# Altium PCB ESC_V1.PcbDoc
Units mm, origin at the board's own origin, x right, y up, seen from the top; angles counter-clockwise.
Board outline 67.06 x 26.04 mm, 4 copper layers (Top Layer, Layer 1, Layer 2, Bottom Layer), stack 0.603 mm thick; 49 components, 34 nets, 167 pads, 98 vias.
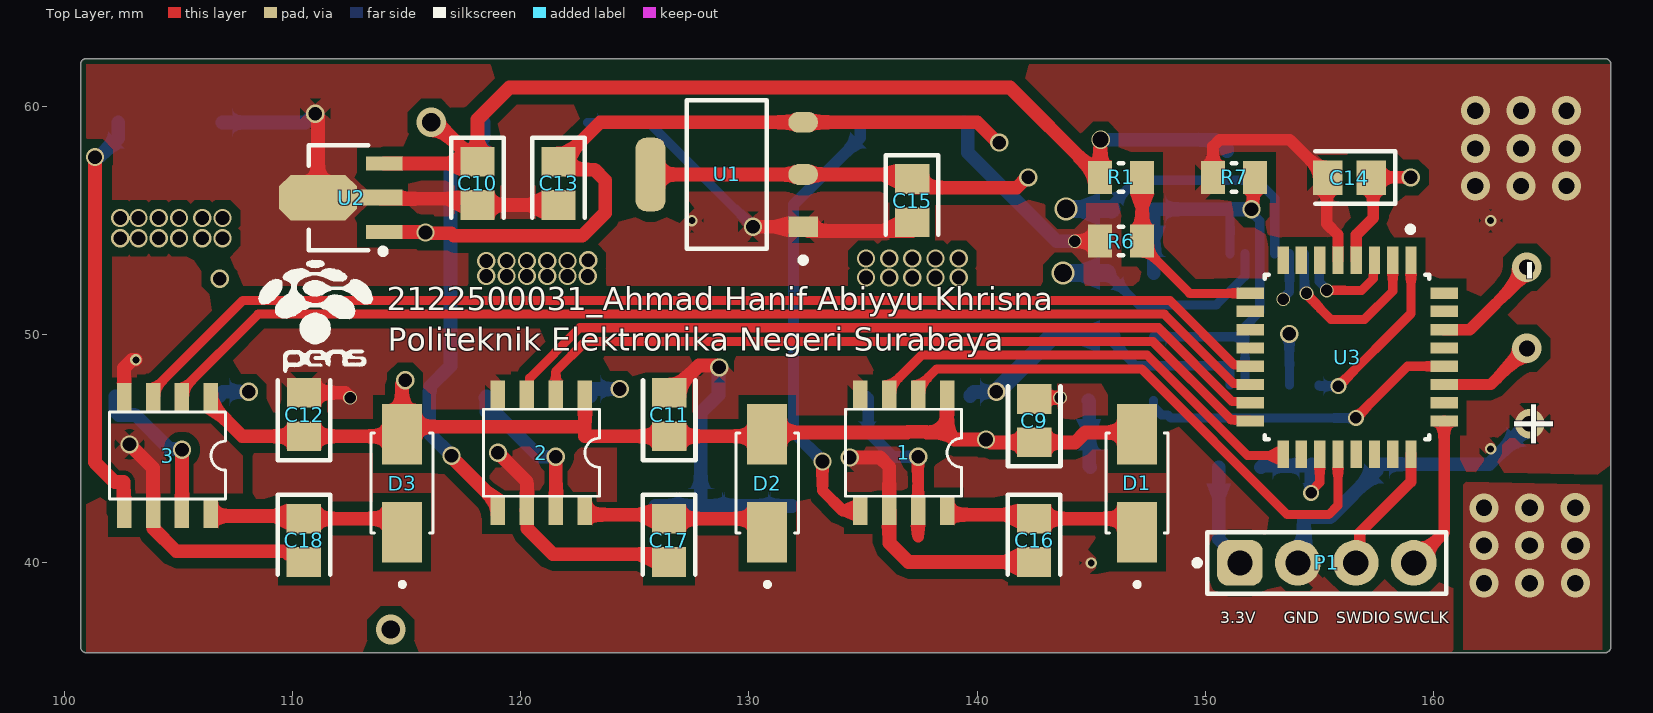
[diagram p0: Top Layer view]
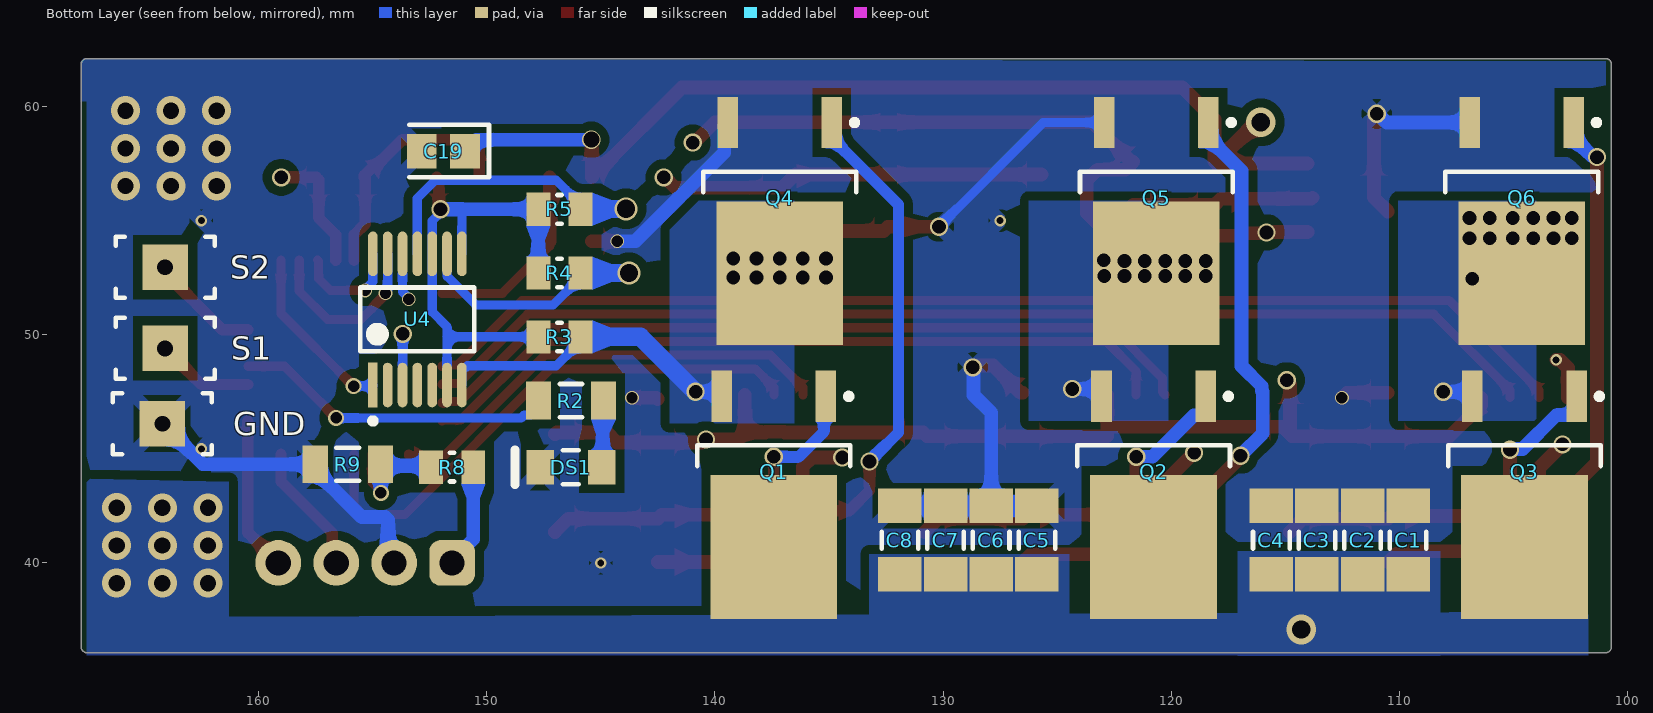
[diagram p1: Bottom Layer view, seen from below]
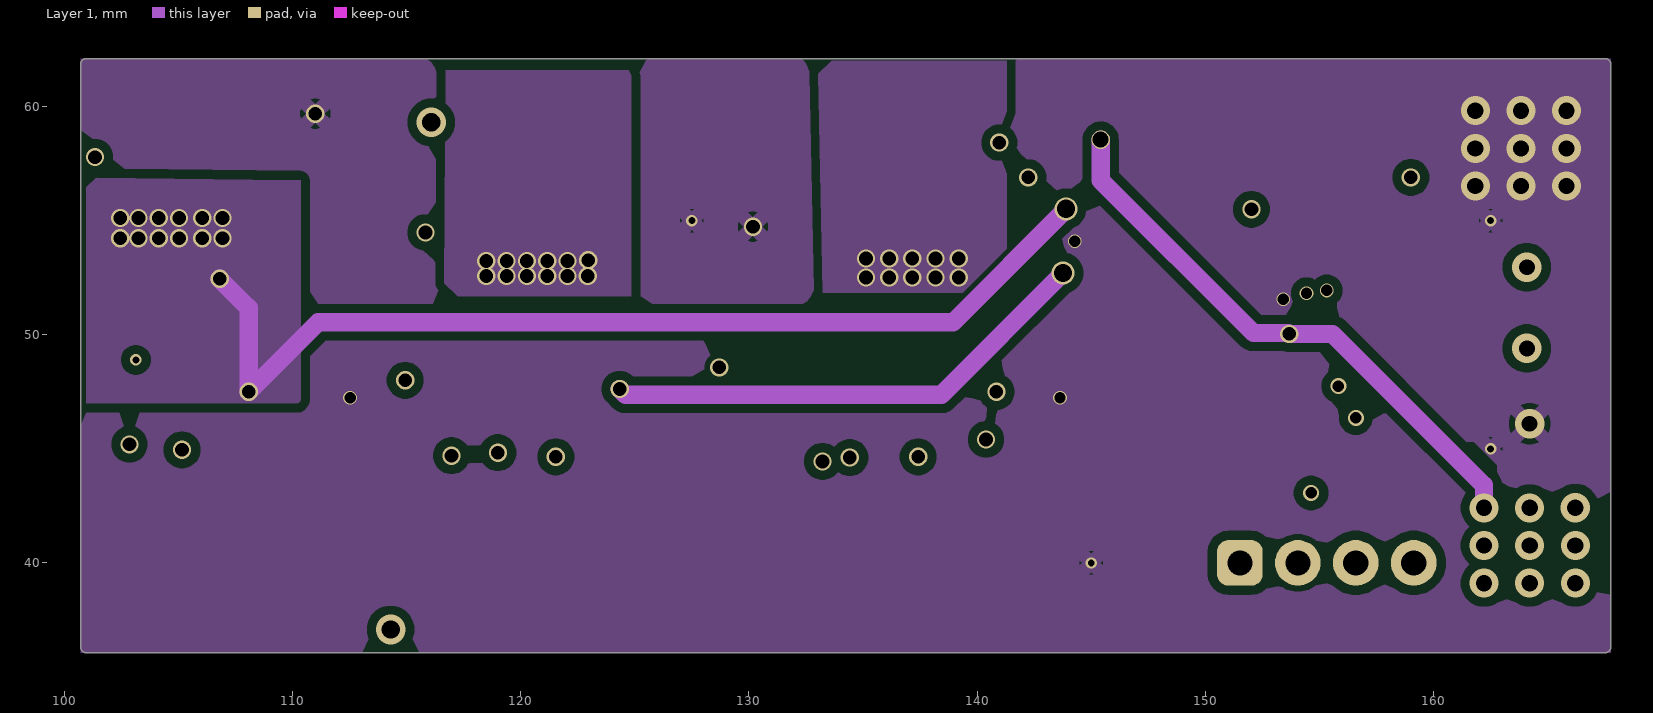
[diagram p2: Layer 1]
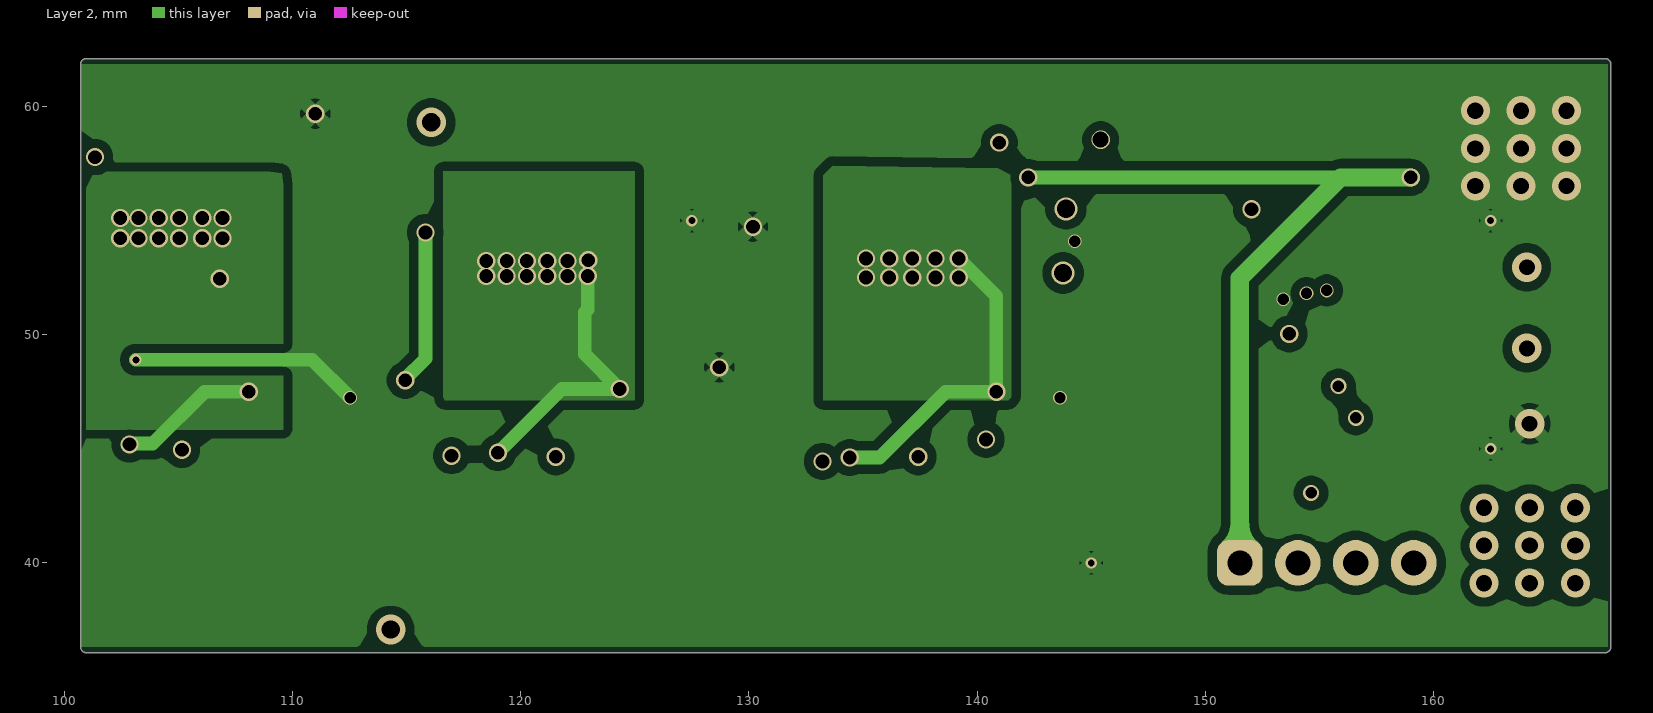
[diagram p3: Layer 2]

## Layer stack, top to bottom
Top Solder: solder mask 0.0102, Solder Resist, Dk 3.5
Top Layer: signal copper 0.0356
Dielectric 2: prepreg 0.0711, PP-006, Dk 4.1
Layer 1: signal copper 0.035
Dielectric 1: dielectric 0.32, FR-4, Dk 4.8
Layer 2: signal copper 0.035
Dielectric 3: prepreg 0.0711, PP-006, Dk 4.1
Bottom Layer: signal copper 0.0356
Bottom Solder: solder mask 0.0102, Solder Resist, Dk 3.5

## Board outline
100.711,36.322 100.711,61.849 cw(c100.965,61.849) 100.965,62.103 167.513,62.103 cw(c167.513,61.849) 167.767,61.849 167.767,36.322 cw(c167.513,36.322) 167.513,36.068 100.965,36.068 cw(c100.965,36.322)

## Design rules (kind name [scope] priority, off if disabled: settings)
Clearance "Clearance GND" [InNet('GND')] p1: gap=0.4 ignorepadtopadclearanceinfootprint=TRUE
Clearance "Clearance Polygon" [All vs IsVia] p2: gap=0.4 ignorepadtopadclearanceinfootprint=TRUE
Clearance [All] p3: gap=0.2 ignorepadtopadclearanceinfootprint=TRUE
PlaneConnect [All] p1: planeconnectstyle=Relief reliefexpansion=0.508 reliefentries=4 reliefconductorwidth=0.6 reliefairgap=0.254
PolygonConnect [All] p1: connectstyle=Relief reliefconductorwidth=0.6 reliefentries=4 polygonreliefangle="45 Angle" airgapwidth=0.254
RoutingVias [All] p1: holewidth=0.5 width=1.27 viastyle="Through Hole" minholewidth=0.2 minwidth=0.2 maxholewidth=5 maxwidth=5
SolderMaskExpansion SolderMaskExpansion_Via [IsVia] p1: expansion=0.102 istentingtop=TRUE useseparateexpansions=TRUE expansionbottom=0.102 istentingbottom=TRUE
SolderMaskExpansion [All] p2: expansion=0.102 istentingtop=FALSE
SupplyNets "Schematic Supply Nets_3" [InNet('GND')] p1: voltage=0.000
SupplyNets "Schematic Supply Nets_2" [InNet('10V')] p2: voltage=0.000
SupplyNets "Schematic Supply Nets_1" [InNet('24V')] p3: voltage=0.000
SupplyNets "Schematic Supply Nets" [InNet('3.3V')] p4: voltage=0.000
Width [All] p1: maxlimit=5 minlimit=0.2 preferedwidth=0.3
29 further rules are at their usual default settings.

## Components (designator, comment, footprint, x,y, rotation, side; value= is the part's Value field where it differs from the comment)
1 "IR2104S" IR2104S 134.874,47.371 r270 top
2 "IR2104S" IR2104S 118.999,47.371 r270 top
3 "IR2104S" IR2104S 102.616,47.244 r270 top
C1 "10uF" FP-C1206C-EB-IPC_A 109.617,41 r90 bottom value="0.10 μF"
C2 "10uF" FP-C1206C-EB-IPC_A 111.617,41 r90 bottom value="0.10 μF"
C3 "10uF" FP-C1206C-EB-IPC_A 113.617,41 r90 bottom value="0.10 μF"
C4 "10uF" FP-C1206C-EB-IPC_A 115.617,41 r90 bottom value="0.10 μF"
C5 "10uF" FP-C1206C-EB-IPC_A 125.889,41 r90 bottom value="0.10 μF"
C6 "10uF" FP-C1206C-EB-IPC_A 127.889,41 r90 bottom value="0.10 μF"
C7 "10uF" FP-C1206C-EB-IPC_A 129.889,41 r90 bottom value="0.10 μF"
C8 "10uF" FP-C1206C-EB-IPC_A 131.889,41 r90 bottom value="0.10 μF"
C9 "2.2uF" C2012-0805 142.494,46.228 r90 top
C10 "0.1uF" C2012-0805 118.11,56.642 r270 top
C11 "2.2uF" C2012-0805 126.5,46.5 r90 top
C12 "2.2uF" C2012-0805 110.5,46.5 r90 top
C13 "0.1uF" C2012-0805 121.666,56.642 r270 top
C14 "100nF" C2012-0805 156.317,56.877 r180 top
C15 "2.2uF" C2012-0805 137.16,55.88 r270 top
C16 "1uF" C2012-0805 142.5,41 r270 top
C17 "1uF" C2012-0805 126.5,41 r270 top
C18 "1uF" C2012-0805 110.5,41 r270 top
C19 "0.1uF" C2012-0805 151.892,58.039 r0 bottom
D1 "ES1J" DIO_ES1J 147,43.5 r90 top
D2 "ES1J" DIO_ES1J 130.8,43.5 r90 top
D3 "ES1J" DIO_ES1J 114.8,43.5 r90 top
DS1 "LED-1206" LUMX-SML-LX1206YC-TR_V 146.304,44.196 r0 bottom
GND "5015" FP-5015-MFG 164.211,46.101 r0 bottom
P1 "61300411121" 61300411121 155.321,40.005 r0 top
Q1 "NCE6080K" INF-PG-TO252-3-313_L 137.414,43 r270 bottom
Q2 "NCE6080K" INF-PG-TO252-3-313_L 120.777,43 r270 bottom
Q3 "NCE6080K" INF-PG-TO252-3-313_L 104.521,43 r270 bottom
Q4 "NCE6080K" INF-PG-TO252-3-313_L 137.16,55 r270 bottom
Q5 "NCE6080K" INF-PG-TO252-3-313_L 120.65,55 r270 bottom
Q6 "NCE6080K" INF-PG-TO252-3-313_L 104.648,55 r270 bottom
R1 "100K" RESC2013X50X30NL20T20 146.304,56.896 r180 top
R2 "100" RESC3216X70X50NL05T20 146.304,47.117 r0 bottom
R3 "10K" RESC2013X50X30NL20T20 146.812,49.911 r180 bottom
R4 "10K" RESC2013X50X30NL20T20 146.812,52.705 r180 bottom
R5 "10K" RESC2013X50X30NL20T20 146.812,55.499 r180 bottom
R6 "10K" RESC2013X50X30NL20T20 146.304,54.102 r0 top
R7 "10K" RESC2013X50X30NL20T20 151.257,56.896 r0 top
R8 "10K" RESC2013X50X30NL20T20 151.511,44.196 r180 bottom
R9 "1206" RESC3216X70X50NL05T20 156.083,44.323 r180 bottom
S1 "5015" FP-5015-MFG 164.084,49.403 r180 bottom
S2 "5015" FP-5015-MFG 164.084,52.959 r180 bottom
U1 "AMS1117" FP-ams1117-IPC_B 129.032,57.023 r180 top
U2 "L78L10" SOT-89_M 112.014,56.007 r180 top
U3 "STM32G070KBT6" FP-LQFP32-5V-MFG 156.21,49.022 r270 top
U4 "LM339PWR" FP-PW0014A-IPC_A 153.035,50.673 r90 bottom

## Footprints (in the part's own frame and the unit in brackets; to place one, negate y for a bottom-side part, rotate by r counter-clockwise, add the part's x,y. Pads: shape width x height; smd on the part's side, far side on the other; paste and mask are expansions set on the pad)
61300411121 [mm] "Pin Header, pitch 2.54 mm, THT, Vertical, single row, 4p"
  rrect50% 2x2 hole 1.1: 1(-3.81,0)
  round 2 hole 1.1: 2(-1.27,0) 3(1.27,0) 4(3.81,0)
  silkscreen extent -5.8,-1.35 5.23,1.35, body extent -5.08,-1.27 5.08,1.27, height 8.57
C2012-0805 [mm] "Capacitor Chip 0805 package"
  rect 1.3x1.5 smd: 1(-0.945,-0.007) 2(0.955,-0.007)
  silkscreen extent -1.99,-1.16 1.51,1.14, body extent -0.89,-0.58 0.89,0.58, height 0.79
DIO_ES1J [mm]
  rect 2.65x1.75 smd: A(2.15,0) K(-2.15,0)
  silkscreen extent -4.54,-1.36 2.19,1.36
FP-5015-MFG [mm]
  rect 2x2 smd paste+0 mask+0: 1(0,0)
  silkscreen extent -2.16,-1.34 2.17,1.34
FP-ams1117-IPC_B [mm]
  rect 1.304x0.912 smd paste+0 mask+0: 1(-3.345,2.29)
  rrect100% 1.304x0.912 smd paste+0 mask+0: 2(-3.345,0) 3(-3.345,-2.29)
  rrect70% 1.304x3.222 smd paste+0 mask+0: 4(3.345,0)
  silkscreen extent -3.47,-3.25 1.75,3.87, body extent -4.25,-3.5 4.25,3.5, height 0.25
FP-C1206C-EB-IPC_A [mm]
  rect 1.505x1.906 smd paste+0 mask+0: 1(-1.501,0) 2(1.501,0)
  silkscreen extent -0.37,-0.8 0.37,0.8, body extent -1.6,-0.8 1.6,0.8, height 0.88
FP-LQFP32-5V-MFG [mm]
  rect 1.2x0.5 smd paste+0 mask+0: 1(-4.25,2.8) 2(-4.25,2) 3(-4.25,1.2) 4(-4.25,0.4) 5(-4.25,-0.4) 6(-4.25,-1.2) 7(-4.25,-2) 8(-4.25,-2.8) 17(4.25,-2.8) 18(4.25,-2) 19(4.25,-1.2) 20(4.25,-0.4) 21(4.25,0.4) 22(4.25,1.2) 23(4.25,2) 24(4.25,2.8)
  rect 0.5x1.2 smd paste+0 mask+0: 9(-2.8,-4.25) 10(-2,-4.25) 11(-1.2,-4.25) 12(-0.4,-4.25) 13(0.4,-4.25) 14(1.2,-4.25) 15(2,-4.25) 16(2.8,-4.25) 25(2.8,4.25) 26(2,4.25) 27(1.2,4.25) 28(0.4,4.25) 29(-0.4,4.25) 30(-1.2,4.25) 31(-2,4.25) 32(-2.8,4.25)
  silkscreen extent -5.72,-3.6 3.6,3.6, body extent -4.95,-4.95 4.95,4.95, height 0.25
FP-PW0014A-IPC_A [mm]
  rect 1.955x0.421 smd paste+0 mask+0: 1(-2.875,1.95)
  rrect100% 1.955x0.421 smd paste+0 mask+0: 2(-2.875,1.3) 3(-2.875,0.65) 4(-2.875,0) 5(-2.875,-0.65) 6(-2.875,-1.3) 7(-2.875,-1.95) 8(2.875,-1.95) 9(2.875,-1.3) 10(2.875,-0.65) 11(2.875,0) 12(2.875,0.65) 13(2.875,1.3) 14(2.875,1.95)
  silkscreen extent -4.57,-2.5 1.4,2.5, body extent -3.17,-2.5 3.23,2.5, height 1.2
INF-PG-TO252-3-313_L [mm] "DPAK, 3-Leads, Body 6.5x6.12mm, Pitch 2.28mm, IPC High Density"
  rect 2.25x0.9 smd: 1(-4.3,2.28) 3(-4.3,-2.28)
  rect 6.3x5.55 smd: 2(2.3,0)
  silkscreen extent -4.42,-3.35 -1.25,3.4, body extent -2.15,-3.32 4.07,3.32, height 2.35
IR2104S [mm]
  rect 1.27x0.635 smd: 1(0,3.81) 2(0,2.54) 3(0,1.27) 4(0,0) 5(5.08,0) 6(5.08,1.27) 7(5.08,2.54) 8(5.08,3.81)
  silkscreen extent 0.63,-0.63 4.44,4.45
LUMX-SML-LX1206YC-TR_V [mm] "SMD, 2-Leads, Body 3.2x1.5mm"
  rect 1.2x1.5 smd: 1(-1.35,0) 2(1.35,0)
  silkscreen extent -0.35,-0.75 2.45,0.75, body extent -1.6,-0.75 1.6,0.75, height 1.25
RESC2013X50X30NL20T20 [mm] "Chip Resistor, 2-Leads, Body 2.00x1.25mm, IPC Medium Density"
  rect 1.05x1.45 smd: 1(-0.925,0) 2(0.925,0)
  silkscreen extent -0.1,-0.63 0.1,0.63, body extent -1.1,-0.72 1.1,0.72, height 0.5
RESC3216X70X50NL05T20 [mm] "Chip Resistor, 2-Leads, Body 3.20x1.60mm, IPC Medium Density"
  rect 1.1x1.65 smd: 1(-1.425,0) 2(1.425,0)
  silkscreen extent -0.5,-0.72 0.5,0.72, body extent -1.63,-0.82 1.62,0.82, height 0.7
SOT-89_M [mm] "SOT89, 3-Leads, Body 4.5x2.4 mm, Pitch 1.5mm, Lead Span 4.1mm, IPC Low Density"
  rect 1.6x0.6 smd: 1(-2,1.5) 3(-2,-1.5)
  rect 2x0.7 smd: 2(-1.8,0)
  oct 3.4x2 smd: 2(0.9,0)
  silkscreen extent -2.08,-2.3 1.3,2.47, body extent -1.3,-2.3 1.3,2.3, height 1.6

## Part data
1 2 3: "Half-Bridge Gate Driver IC Non-Inverting 8-SOIC", Package="SO-8 Infineon", Availability=Unavailable, MF="Infineon Technologies", MP=IR2104S, Price=None, SnapEDA_Link=https://www.snapeda.com/parts/IR2104S/Infineon%20Technologies/view-part/582439/?ref=snap
C1 C2 C3 C4 C5 C6 C7 C8: library part CMP-03020-000153-1, "CAP CER 0.1UF 100V X7R 1206", Capacitance="0.10 μF", Manufacturer=KEMET, Manufacturer Part Number=C1206C104K1RACTU, Package=C1206C-EB, Temperature="-55°C to +150°C", Temperature Characteristic=X7R, Temperature Coefficient=15%, Temperature Range High=+150°C, Temperature Range Low=-55°C, Tolerance=0.1, Voltage Rating="100 V", Automotive=Yes, Automotive Grade="Grade 0", Category=Cap, ComponentLink2Description=Datasheet, ComponentLink2URL=https://content.kemet.com/datasheets/KEM_C1007_X8R_ULTRA_150C_SMD.pdf, Device Class L1="Passive Components", Device Class L2=Capacitors, Device Class L3="Ceramic Capacitors", Digikey Description="CAP CER 0.1UF 100V X7R 1206", Height=0.88mm, Ipc Land Pattern Name=CAPC320160X78, Lead Free=Yes, Material=Ceramic, Mouser Description="CAP CER 0.1UF 100V X7R 1206", Octopart=https://octopart.com/c1206c104k1ractu-kemet-89521, RoHS=TRUE
C9 C10 C11 C12 C13 C14 C15 C16 C17 C18 C19: library part Capacitor, "Capacitor", Volt=16V, AEMS Code=2100341, ComponentLink1Description="Digikey Part Link", ComponentLink2Description="Open Datasheet", ComponentLink2URL=H:\LIBRARY\LIBRARY.Datasheet\, Published=13-April-2009, Publisher="Hoang Nguyen", Vendor=Digikey
D1 D2 D3: "Diode Standard 600V 1A Surface Mount SMA (DO-214AC)", Package="SMA-2 ON Semiconductor", Arrow_Electronics-Purchase-URL=https://snapeda.com/shop?store=Arrow+Electronics&id=1637442, Availability=Good, DigiKey-Purchase-URL=https://snapeda.com/shop?store=DigiKey&id=1637442, ES1J=https://www.snapeda.com/parts/ES1J/ON%20Semiconductor/view-part/1637442/?ref=eda, MF="ON Semiconductor", Mouser-Purchase-URL=https://snapeda.com/shop?store=Mouser&id=1637442, MP=ES1J, Price=None, SnapEDA_Link=https://www.snapeda.com/parts/ES1J/ON%20Semiconductor/view-part/1637442/?ref=snap
DS1: library part CMP-2000-07124-1, "Yellow LED, Water Clear Len, 585 nm, 2.1 V, -40 to 85 degC, 2-Pin SMD, RoHS, Tape and Reel", Color=Yellow, Current - Test=20mA, Lens Color=Colorless, Manufacturer=Lumex, Millicandela Rating=6mcd, Package / Case=1206(3216Metric), Package Description="2-Pin Surface Mount Device, Body 3.2 x 1.5 mm", Package Reference=SML-LX1206YC-TR, Standard Package=3,000, Supplier Device Package=1206, Voltage - Forward (Vf) (Typ)=2.1V, Catalog Drawings=SML-LX1206SeriesTopSML-LX1206SeriesSideSML-LX1206SeriesBottomSML-LX1206SeriesFootprint, Category=Optoelectronics, Datasheet URL=http://www.lumex.com/content/files/ProductAttachment/SML-LX1206YC-TR.pdf, Datasheet Version="Rev. K, 08/2012", Family=LEDIndication-Discrete, Features=-, Height (Max)=1.10mm, Lens Style/Size=RectanglewithFlatTop, Lens Transparency=Clear, Manufacturer URL=http://www.lumexinstruments.com/, Mounting Technology=SurfaceMount, Mounting Type=SurfaceMount, Online Catalog=SML-LX1206RectanglewithFlatTop1206PackageLEDs, Other Names=67-1358-2LU60357TRSMLLX1206YCTR, Packaging=Tape&Reel(TR), Product Training Modules=LEDsBenefitsofCustomLEDandLCDTechnology, RoHS Information=RoHSCertofCompliance, Series=-, Size / Dimension=3.20mmLx1.60mmW, Viewing Angle=160°, Wavelength - Dominant=-, Wavelength - Peak=585nm
GND S1 S2: library part CMP-2000-05183-2, "PC TEST POINT MINIATURE", Manufacturer=keystone, Automotive=No, Category=Conn, ComponentLink2Description=Datasheet, ComponentLink2URL=http://www.keyelco.com/product-pdf.cfm?p=1353, Conn Orientation=Straight, Contact Material=Silver, Device Class L1=Connectors, Device Class L2=unset, Device Class L3=unset, Digikey Description="PC TEST POINT MINIATURE", Height=1.65mm, Lead Free=Yes, Manufacturer Part Number=5015, Number of Contacts=1, Octopart=https://octopart.com/5015-keystone-3822, Package=5015, RoHS=TRUE
P1: library part CMP-1502-01064-3, Color=Black, Contact Resistance=20mΩ, Current Rating=3A, Max Operating Temperature=105°C, Min Operating Temperature=-40°C, Operating Supply Voltage=250V, Connector Type="Male Pin", Contact Material=Copper, Contact Mating Length=5.9944mm, Contact Plating=Gold, Gender=Male, Height=8.89mm, Lead Free="Lead Free", Lead Pitch=2.54mm, Mount="Through Hole", NexarPartId=32855522, Number of Contacts=4, Number of Pins=4, Number of Positions=4, Number of Rows=1, Orientation=Vertical, Packaging=Bulk, Pitch=2.54mm, REACH SVHC=Unknown, RoHS=Compliant, Termination=Solder, Voltage Rating=250V
Q1 Q2 Q3 Q4 Q5 Q6: library part CMP-1164-00349-1, "N-Channel CoolMOS E6 Power-Transistor, 600 V VDS, 7.3 A ID, -55 to 150 degC, PG-TO252-3-313, Reel, Green", Manufacturer=Infineon, PartNumber=IPD60R600C6, ComponentLink1Description="Manufacturer URL", ComponentLink1URL=http://www.infineon.com/, ComponentLink2Description=Datasheet, ComponentLink2URL=http://www.infineon.com/dgdl/IPD60R600C6_2_0.pdf?folderId=db3a30431ff98815012019af55de3f2c&fileId=db3a30432239cccd0122a83152b97d6f, ComponentLink3Description="Package Specification", ComponentLink3URL=http://www.infineon.com/dgdl/PG-TO252-3-313-Package_Overview.pdf?folderId=db3a30432b57a660012b81890ade72d2&fileId=db3a30432b57a660012b8193af2872eb, DatasheetVersion="Rev. 2.0", Green=TRUE, ID (max)="7.3Â A", IDpuls (max)="19Â A", Mounting Technology="Surface Mount", PackageDescription="3-Pin Plastic (Green) Transistor Single Outline Package, 6.5 x 6.12 mm Body, 2.28 mm Pitch", PackageReference=PG-TO252-3-313, PackageVersion=Oct-10, Packing=Reel, Polarity=N, Ptot (max)="63Â W", QG="20.5Â nC", RDS (on) (max)="600Â mOhm", Rth="2Â K/W", RthJA (max)="62Â K/W", RthJC (max)="2Â K/W", Technology="CoolMOS C6", VDS (max)="600Â V", VGS(th) (max)="3.5Â V", VGS(th) (min)="2.5Â V"
R1 R3 R4 R5 R6 R7 R8: library part CMP-2001-04915-1, Manufacturer="Vishay Dale", Part Number=CRCW080510R0FKEA
R2 R9: library part CMP-2003-00541-1, Manufacturer=Panasonic, Part Number=ERJ-8GEY0R00V
U1: library part CMP-209535-000002-1, "1A LOW DROPOUT VOLTAGE REGULATOR", RoHS Compliant=Yes
U2: library part CMP-0244-00399-1, "Positive Voltage Regulator, 10V, 4-Pin SOT-89, Tape and Reel", ComponentLink1Description="Manufacturer URL", ComponentLink1URL=http://www.st.com, ComponentLink2Description=Datasheet, ComponentLink2URL=http://www.st.com/internet/com/TECHNICAL_RESOURCES/TECHNICAL_LITERATURE/DATASHEET/CD00000446.pdf, DatasheetVersion=1/02/2011, PackageDescription="3-Pin SOT-89 Package 1.5 mm Pitch, 4.1 mm Lead Span", PackageReference=SOT-89, PackageVersion=2011
U3: library part CMP-12105-000041-1, "MAINSTREAM VALUE LINE, ARM CORTE", Ambient Temperature Range High=+85°C, Ambient Temperature Range Low=-40°C, Frequency=64MHz, Manufacturer=STMicroelectronics, Max Junction Temp=+105°C, Max Supply Voltage=3.6V, Min Supply Voltage=2V, Nominal Supply Current=0.3-6.9mA, Package=LQFP32-5V, Temperature="-40°C to +85°C", Automotive=No, Category=IC, ComponentLink2Description=Datasheet, ComponentLink2URL=https://www.st.com/resource/en/datasheet/stm32g070kb.pdf, Core Architecture="ARM Cortex-M0+", Data Bus Width=32bits, Device Class L1="Integrated Circuits (ICs)", Device Class L2="Embedded Processors and Controllers", Device Class L3=Microcontrollers, Digikey Description="MAINSTREAM VALUE LINE, ARM CORTE", Height=1.6mm, Interface=I2C,SPI,UART,USART,LIN,IrDA,I2S,SMBus,Other, Ipc Land Pattern Name=QFP80P900X900X160-32, Lead Free=Yes, Manufacturer Part Number=STM32G070KBT6, Memory Size=128KBytes, Memory Type=FLASH, Mouser Description="Cortex M0 128K LQFP32 85°C", Number Of A/D Converters=1, Number Of Adc Channels=13, Number Of Cores=1, Number Of I2C Channels=2, Number Of I/Os=29, Number Of Spi Channels=2, Number Of Timers/Counters=11, Number Of Uart Channels=4, Octopart=https://octopart.com/stm32g070kbt6-stmicroelectronics-97300430, Ram Size=36KBytes, RoHS=TRUE, Standoff Height=0.05mm, Temperature Range High=+85°C, Temperature Range Low=-40°C
U4: library part CMP-04896-000076-1, "IC QUAD DIFF COMPARATOR 14-TSSOP", Case/Package=TSSOP, Dual Supply Voltage=9V, Input Bias Current=250nA, Input Offset Voltage (Vos)=5mV, Max Dual Supply Voltage=15V, Max Operating Temperature=70°C, Max Supply Current=500uA, Max Supply Voltage=30V, Min Dual Supply Voltage=1V, Min Operating Temperature=0°C, Min Supply Voltage=2V, Nominal Supply Current=2mA, Operating Supply Voltage=28V, Output Current=20mA, Output Current per Channel=6mA, Package Quantity=2000, Quiescent Current=2.5mA, Voltage Gain=106.02dB, Contact Plating=Gold, Height=1.15mm, Lead Free="Lead Free", Length=5mm, Max Input Current=250nA, Mount="Surface Mount", Number of Channels=4, Number of Elements=4, Number of Pins=14, Output Type=TTL, Packaging="Tape and Reel", Radiation Hardening=No, REACH SVHC="No SVHC", Response Time=1.3us, RoHS Compliant=Yes, Series=LM339, Supply Current=2mA, Technology=BIPOLAR, Weight=0.002018oz, Width=4.4mm

## Via types
v1: diameter 0.8, hole 0.6, Top Layer to Bottom Layer, tented both sides, 58 vias
v2: diameter 1.27, hole 0.711, Top Layer to Bottom Layer, tented both sides, 16 vias
v3: diameter 0.6, hole 0.5, Top Layer to Bottom Layer, tented both sides, 6 vias
v4: diameter 0.5, hole 0.3, Top Layer to Bottom Layer, tented both sides, 5 vias
v5: diameter 0.7, hole 0.5, Top Layer to Bottom Layer, tented both sides, 3 vias
v6: diameter 1.3, hole 0.7, Top Layer to Bottom Layer, tented both sides, 3 vias
v7: diameter 1, hole 0.8, Top Layer to Bottom Layer, tented both sides, 2 vias
v8: diameter 1.3, hole 0.8, Top Layer to Bottom Layer, tented both sides, 2 vias
v9: diameter 0.8, hole 0.7, Top Layer to Bottom Layer, tented both sides, 1 vias
v10: diameter 1.3, hole 0.711, Top Layer to Bottom Layer, 1 vias
v11: diameter 1.27, hole 0.711, Top Layer to Bottom Layer, 1 vias

## Nets (pads, with @x,y where several pads share a name; then routed paths per layer and width w, separated by ;. In a path a pad name is that pad's centre, name@x,y a point inside that pad or via, vN(x,y) a via of type N, cw(c..) or ccw(c..) an arc to the next point about the centre after c; other vN are vias at no path point)
3.3V: C14.1 C15.1 P1.1 R8.2 U1.2 U1.4 U3.4 | length 62.6
  Top Layer w0.5: U3.4 156.61,54.375 157.353,55.118 157.353,56.793 157.456,56.896 v1(159.004,56.896)
  Top Layer w0.6: U1.4 U1.2 136.474,57.023 137.053,56.444 137.153,56.444 141.733,56.444 142.186,56.896 v1(142.24,56.896)
  Layer 2 w0.6: v1(142.24,56.896) 142.246,56.89 155.916,56.89
  Layer 2 w0.8: P1.1 151.511,46.942 151.511,52.479 155.928,56.896 v1(159.004,56.896)
  Bottom Layer w0.6: R8.2 150.586,41.038 151.511,40.113 P1.1
10V: 1.1 2.1 3.1 C9.1 C11.1 C12.1 C13.1 D1.A D2.A D3.A U1.3 U2.1 | length 88.9
  Top Layer w0.6: 3.1 106.426,46.926 107.797,45.555 C12.1 114.705,45.555 D3.A ; U2.1 115.824,54.507 v1(115.824,54.483) 115.862,54.445 116.955,54.445 117.063,54.337 122.699,54.337 123.698,55.336 123.698,56.769 123.23,57.237 122.009,57.237 C13.1 ; v1(114.935,48.006) 114.935,47.952 114.8,47.817 D3.A ; C13.1@121.759,57.587 123.485,59.313 U1.3 140,59.313 140.793,58.52 140.816,58.52 v1@140.932,58.404 ; 2.1 122.809,45.974 ; D2.A@130.705,45.555 C11.1 122.809,45.555 122.809,45.974 ; D2.A@130.87,45.72 136.928,45.72 136.958,45.75 137.765,45.75 137.795,45.72 138.684,45.72 ; 1.1 138.684,45.72 ; v1(140.387,45.413) 138.991,45.413 138.684,45.72 ; v1@140.452,45.478 140.452,45.401 140.57,45.283 144.295,45.283 144.731,45.72 146.93,45.72 D1.A ; D3.A 115.124,45.974 122.809,45.974
  Layer 2 w0.6: v1(114.935,48.006) 114.935,48.06 115.824,48.949 v1(115.824,54.483)
  other v1: 140.97,58.42
24V: C1.1 C2.1 C3.1 C4.1 C5.1 C6.1 C7.1 C8.1 C10.1 C19.1 Q1.2 Q2.2 Q3.2 R1.2 U2.3 U4.3 | length 73.1
  Top Layer w0.6: U2.3 118.023,57.507 C10.1 ; v8(116.078,59.309) 116.212,59.175 116.415,59.175 118.003,57.587 C10.1 ; v9(145.415,58.547) 145.397,58.529 145.397,56.914 R1.2 145.379,57.096 145.154,57.321 144.954,57.321 141.442,60.833 119.507,60.833 118.103,59.429 C10.1
  Layer 1 w0.8: v9(145.415,58.547) 145.415,56.769 152.108,50.076 153.632,50.076 v1(153.67,50.038) 155.575,50.038 162.211,43.402 v2(162.211,42.418)
  Bottom Layer w0.4: v1(153.67,50.038) 153.681,50.027 153.681,47.802 U4.3
  Bottom Layer w0.6: v9(145.415,58.547) 150.446,58.547 150.497,58.496 150.597,58.496 150.947,58.146 C19.1
  other v2: 162.211,39.116 164.211,39.116 166.211,39.116 162.211,40.767 164.211,40.767 166.211,40.767 164.211,42.418
  other v8: 114.3,37.084
  other v10: 166.211,42.418
A: 1.6 C16.2 Q1.3 Q4.2 R3.2 U4.7 | length 40
  Top Layer w0.6: v1(134.422,44.62) 135.739,44.62 136.144,44.215 1.6 136.162,42.273 136.162,40.876 136.993,40.045 C16.2
  Layer 2 w0.6: v1(134.422,44.62) 135.733,44.62 138.611,47.498 v1(140.843,47.498) 140.843,51.689 v1(139.192,53.34)
  Bottom Layer w0.4: R3.2 145.887,49.711 146.957,48.641 150.84,48.641 150.912,48.569 151.075,48.569 151.085,48.559 U4.7
  Bottom Layer w0.6: Q1.3 139.694,47.348 139.844,47.498 v1(140.843,47.498)
  Bottom Layer w0.8: v1(140.843,47.498) 143.256,49.911 R3.2
  other v1: 135.128,52.505 136.144,52.505 137.16,52.505 138.176,52.505 139.192,52.505 135.128,53.34 136.144,53.34 137.16,53.34 138.176,53.34
A-H: 1.7 Q1.1 | length 7.7
  Top Layer w0.5: 137.414,41.148 1.7 v1(137.414,44.65)
  Bottom Layer w0.5: Q1.1 135.222,47.212 135.222,45.753 136.325,44.65 v1(137.414,44.65)
A-L: 1.5 Q4.1 | length 19.9
  Top Layer w0.5: v1(133.223,44.45) 133.223,43.18 134.112,42.291 1.5
  Bottom Layer w0.5: v1(133.223,44.45) 131.953,45.72 131.953,55.698 134.88,58.625 Q4.1
B: 2.6 C17.2 Q2.3 Q5.2 R4.2 U4.9 | length 56.1
  Top Layer w0.6: v1(118.999,44.831) 120.269,43.561 2.6 ; 2.6@120.251,42.309 120.287,42.273 120.287,41.512 121.412,40.386 126.152,40.386 C17.2
  Layer 1 w0.8: v1(124.333,47.625) 124.587,47.371 138.43,47.371 v7(143.764,52.705)
  Layer 2 w0.6: v1(118.999,44.831) 121.793,47.625 v1(124.333,47.625) 122.809,49.149 122.809,50.978 122.936,51.105 v1(122.936,52.578)
  Bottom Layer w0.4: R4.2@145.687,52.705 147.084,51.308 150.475,51.308 151.731,52.564 151.731,53.544 U4.9
  Bottom Layer w0.6: Q2.3 123.057,47.475 123.207,47.625 v1(124.333,47.625)
  Bottom Layer w0.8: v7(143.764,52.705) R4.2@145.687,52.705
  other v1: 118.491,52.578 119.38,52.578 120.269,52.578 121.158,52.578 122.047,52.578 118.491,53.237 119.38,53.237 120.269,53.237 121.158,53.237 122.047,53.237 122.953,53.266
B-H: 2.7 Q2.1 | length 7
  Top Layer w0.6: v1(121.539,44.65) 2.7 2.7@121.557,42.273
  Bottom Layer w0.6: Q2.1@118.441,47.244 Q2.1 118.497,46.625 118.647,46.475 119.006,46.475 120.831,44.65 v1(121.539,44.65)
B-L: 2.5 Q5.1 | length 19.2
  Top Layer w0.6: v1(116.967,44.704) 117.005,44.666 117.005,44.602 118.999,42.608 2.5
  Bottom Layer w0.6: v1(116.967,44.704) 115.991,45.68 115.991,47.507 116.035,47.55 116.035,47.743 116.924,48.632 116.924,57.179 118.37,58.625 Q5.1
BATT-VOLT: R1.1 R6.2 U3.9 | length 8.6
  Top Layer w0.4: R6.2 147.229,53.902 149.315,51.816 151.892,51.816 151.898,51.822 U3.9
  Top Layer w0.6: R6.2 R1.1
C: 3.6 C18.2 Q3.3 Q6.2 R5.2 U4.11 | length 75.2
  Top Layer w0.6: v1(102.854,45.196) 103.886,44.164 3.6 ; 103.904,41.512 104.902,40.513 109.692,40.513 109.81,40.395 110.143,40.395 C18.2
  Layer 1 w0.8: v1(106.807,52.451) 108.077,51.181 v1(108.077,47.498) 111.125,50.546 138.938,50.546 143.891,55.499 v7(143.891,55.517)
  Layer 2 w0.6: v1(102.854,45.196) 102.892,45.234 103.877,45.234 106.14,47.498 v1(108.077,47.498)
  Bottom Layer w0.4: R5.2@145.887,55.699 146.957,56.769 152.247,56.769 153.039,55.977 153.039,53.552 U4.11
  Bottom Layer w0.6: Q3.3 106.801,47.348 106.951,47.498 v1(108.077,47.498)
  Bottom Layer w0.8: v7(143.891,55.517) 143.9,55.508 145.878,55.508 R5.2
  other v1: 102.446,54.229 103.251,54.229 104.14,54.229 105.029,54.229 106.045,54.229 106.934,54.229 102.446,55.118 103.251,55.118 104.14,55.118 105.029,55.118 106.045,55.118 106.934,55.118
C-H: 3.7 Q3.1 | length 7.1
  Top Layer w0.6: 3.7 v1(105.156,44.958)
  Bottom Layer w0.6: Q3.1 102.241,46.625 102.391,46.475 103.131,46.475 104.61,44.996 105.118,44.996 v1(105.156,44.958)
C-L: 3.5 Q6.1 | length 18.4
  Top Layer w0.6: v1(101.346,57.785) 101.346,44.409 102.205,43.55 102.598,43.55 102.598,42.182 3.5
  Bottom Layer w0.6: v1(101.346,57.785) 101.384,57.823 101.566,57.823 102.368,58.625 Q6.1
FGND: R3.1 R4.1 R5.1 R7.2 U4.6 U4.8 U4.10 | length 22.6
  Top Layer w0.5: v1(152.019,55.499) 152.1,55.58 152.1,56.814 R7.2
  Bottom Layer w0.4: R3.1 151.735,49.911 ; 151.003,55.499 151.085,55.417 U4.8 ; U4.6 151.735,49.911 ; v1(152.019,55.499) 152.019,55.354 152.385,54.988 152.385,51 151.735,50.35 151.735,49.911
  Bottom Layer w0.6: R4.1 R5.1 151.003,55.499 v1(152.019,55.499)
GND: 1.4 2.4 3.4 C1.2 C2.2 C3.2 C4.2 C5.2 C6.2 C7.2 C8.2 C9.2 C10.2 C11.2 C12.2 C13.2 C14.2 C15.2 C19.2 DS1.2 GND.1 P1.2 Q4.3 Q5.3 Q6.3 R6.1 R7.1 R9.1 U1.1 U2.2 U3.5 U4.12 | length 99.2
  Top Layer w0.5: R7.1 150.332,58.254 150.625,58.547 153.699,58.547 154.862,57.384 154.962,57.384 155.362,56.984 C14.2 155.321,56.843 155.321,54.864 155.81,54.375 U3.5
  Top Layer w0.6: 3.4 102.616,48.549 102.967,48.9 v4(103.135,48.9) ; C12.2 112.311,47.455 v3(112.522,47.244) ; U2.2@110.507,55.4 111.114,56.007 111.114,59.52 110.998,59.636 v1(110.998,59.69) ; U2.2@113.814,56.007 113.864,55.957 117.833,55.957 C10.2 C13.2 ; C11.2 126.607,47.455 127.806,48.654 128.565,48.654 128.648,48.571 v1(128.702,48.571) ; v1(130.175,54.737) 130.177,54.735 132.375,54.735 U1.1 132.417,54.733 132.606,54.544 C15.2@137.153,54.544 ; C9.2 142.562,47.244 v3(143.629,47.244) ; v3(144.272,54.102) R6.1
  Layer 2 w0.6: v4(103.135,48.9) 110.866,48.9 v3(112.522,47.244)
  Bottom Layer w0.4: Q5.3 125.612,59.3 v1(130.175,54.737) ; v3(153.416,51.562) 153.416,51.616 153.685,51.885 U4.12
  Bottom Layer w0.6: Q6.3 110.554,59.3 110.944,59.69 v1(110.998,59.69) ; C5.2 C6.2 ; v1(128.702,48.571) 128.664,48.533 128.664,47.364 127.889,46.589 C6.2 ; C8.2 C7.2 C6.2 ; Q4.3 139.59,59.15 139.59,57.99 143.478,54.102 v3(144.272,54.102) ; P1.2 154.319,40.273 154.319,41.889 154.449,42.018 155.478,42.018 157.508,44.048 R9.1 162.433,44.323 v6(164.211,46.101)
  other v2: 161.83,56.515 163.83,56.515 165.83,56.515 161.83,58.166 163.83,58.166 165.83,58.166 161.83,59.817 163.83,59.817
  other v4: 145,40 162.5,45 127.5,55 162.5,55
  other v11: 165.83,59.817
LED: R2.2 U3.28 | length 14.1
  Top Layer w0.4: v5(156.591,46.355) 158.858,48.622 U3.28
  Bottom Layer w0.4: R2.2 147.729,46.842 148.079,46.492 148.354,46.492 148.491,46.355 v5(156.591,46.355)
Net1_8: 1.8 C16.1 D1.K | length 8.8
  Top Layer w0.6: 1.8 138.684,42.135 138.702,42.118 142.32,42.118 C16.1 146.425,41.945 147,41.37 D1.K
Net2_8: 2.8 C17.1 D2.K | length 8.5
  Top Layer w0.6: 2.8 122.809,42.135 122.827,42.118 126.32,42.118 C17.1 130.225,41.945 130.8,41.37 D2.K
Net3_8: 3.8 C18.1 D3.K | length 8.8
  Top Layer w0.6: 3.8 106.426,42.072 106.444,42.054 110.383,42.054 C18.1 114.225,41.945 114.8,41.37 D3.K
NetDS1_1: DS1.1 R2.1 | length 3
  Bottom Layer w0.6: R2.1 144.916,47.079 144.916,44.234 DS1.1
NetR8_1: R8.1 R9.2 U3.19 | length 5.4
  Top Layer w0.4: v5(154.633,43.068) 154.633,43.15 155.01,43.527 U3.19
  Bottom Layer w0.6: R8.1 152.499,44.259 154.595,44.259 R9.2 154.645,44.31 154.645,43.081 v5(154.633,43.068)
OD-A: 1.3 U3.17 | length 20.1
  Top Layer w0.4: 1.3 136.144,47.688 137.561,49.105 147.45,49.105 151.852,44.704 153.416,44.704 153.41,44.71 U3.17
OD-B: 2.3 U3.15 | length 34.7
  Top Layer w0.4: 2.3 120.387,47.489 120.387,48.103 122.589,50.305 147.947,50.305 151.181,47.072 151.81,47.072 151.892,46.99 151.924,47.022 U3.15
OD-C: 3.3 U3.13 | length 51.2
  Top Layer w0.4: 3.3 103.886,47.561 107.83,51.505 148.444,51.505 151.278,48.672 151.861,48.672 151.911,48.622 U3.13
PWM-A: 1.2 U3.20 | length 24.1
  Top Layer w0.4: 1.2 137.414,47.688 138.231,48.505 147.202,48.505 153.589,42.118 155.403,42.118 155.81,42.525 U3.20
PWM-B: 2.2 U3.16 | length 33.4
  Top Layer w0.4: 2.2 121.539,48.407 122.838,49.705 147.699,49.705 151.132,46.272 151.91,46.272 U3.16
PWM-C: 3.2 U3.14 | length 49.8
  Top Layer w0.4: 3.2 105.156,47.561 108.5,50.905 148.196,50.905 151.229,47.872 151.91,47.872 U3.14
S1: S1.1 U3.27 | length 4.3
  Top Layer w0.5: U3.27 162.503,47.822 v6(164.084,49.403)
S2: S2.1 U3.30 | length 4.9
  Top Layer w0.5: U3.30 161.584,50.222 163.937,52.574 163.937,52.812 v6(164.084,52.959)
SWCLK: P1.4 U3.25 | length 6.8
  Top Layer w0.5: P1.4 160.46,41.334 U3.25
SWDIO: P1.3 U3.24 | length 5.8
  Top Layer w0.5: P1.3 156.757,40.171 156.757,41.314 159.01,43.567 U3.24
ZC-A: U3.1 U4.1 | length 7.7
  Top Layer w0.4: v5(155.829,47.752) 159.01,50.933 U3.1
  Bottom Layer w0.4: U4.1 154.985,47.762 154.995,47.752 v5(155.829,47.752)
ZC-B: U3.3 U4.14 | length 4.8
  Top Layer w0.4: v3(155.321,51.943) 156.845,51.943 157.36,52.458 157.36,53.222 U3.3
  Bottom Layer w0.4: U4.14 154.989,53.544 154.989,52.329 155.321,51.997 v3(155.321,51.943)
ZC-C: U3.2 U4.13 | length 7.9
  Top Layer w0.4: v3(154.432,51.816) 154.432,51.762 155.036,51.158 155.036,51.139 155.502,50.673 156.972,50.673 158.21,51.911 U3.2
  Bottom Layer w0.4: U4.13 154.335,51.967 154.432,51.87 v3(154.432,51.816)
pads on no net: U3.6 U3.7 U3.8 U3.10 U3.11 U3.12 U3.18 U3.21 U3.22 U3.23 U3.26 U3.29 U3.31 U3.32 U4.2 U4.4 U4.5

## Polygon pours and split planes (outlines as drawn)
24V on Top Solder "GND" (solid, pour order 1): 161.29,43.561 161.29,37.592 167.64,37.592 167.64,43.561
GND on Top Solder "GND" (solid, pour order 4): 160.782,61.849 160.782,55.118 167.64,55.118 167.64,61.849
A on Bottom Solder "24v" (solid): 136.588,49.53 136.588,46.101 140.272,46.101 140.272,49.53
B on Bottom Solder "24v" (solid): 120.142,49.784 120.142,46.101 123.571,46.101 123.571,49.784
C on Bottom Solder (solid): 104.14,50.228 104.14,46.291 107.569,46.291 107.569,50.228
no net on Bottom Solder "GND" (solid): 101.6,37.971 101.6,36.068 168.148,36.068 168.148,37.719
GND on Bottom Solder "GND" (solid): 101.6,62.125 101.6,60.198 167.767,60.198 167.767,62.377
24V on Bottom Solder "GND" (solid, pour order 5): 161.29,43.561 161.29,36.068 167.894,36.068 167.894,43.561
GND on Bottom Solder "GND" (solid, pour order 62): 160.909,61.849 160.909,55.372 167.767,55.372 167.767,61.849
GND on Top Layer "GND_L01_P031" (solid, remove dead copper, pour order 31): 100.965,61.849 167.767,61.849 167.767,36.068 100.965,36.068
A on Top Layer "A_L01_P022" (solid, remove dead copper, pour order 22): 134.239,45.085 134.239,42.926 139.573,42.926 139.573,45.085
B on Top Layer "B_L01_P021" (solid, pour order 21): 118.364,45.085 118.364,42.672 124.206,42.672 124.206,45.085
C on Top Layer "C_L01_P013" (solid, pour order 13): 101.981,46.101 101.981,43.053 107.823,43.053 107.823,44.704 106.426,46.101
GND on Top Layer "GND_L01_P024" (solid, pour order 24): 160.909,55.372 160.909,61.849 167.259,61.849 167.259,55.372
24V on Top Layer "24v" (solid, pour order 23): 161.29,43.561 161.29,36.195 167.386,36.195 167.386,43.434
GND on Bottom Layer "GND" (solid, remove dead copper, pour order 64): 100.965,61.988 100.965,36.068 167.513,36.068 167.513,62.103
A on Bottom Layer "A_L04_P010" (solid, remove dead copper, pour order 10): 136.525,55.88 136.525,46.117 141.986,46.117 141.986,55.88
GND on Bottom Layer "GND" (solid, pour order 16): 101.727,61.852 101.727,60.236 167.794,60.236 167.794,62.104
24V on Bottom Layer "GND" (solid, pour order 15): 101.727,37.871 101.727,35.967 167.513,35.967 167.513,37.621
C on Bottom Layer "C_L04_P014" (solid, remove dead copper, pour order 14): 104.013,55.88 104.013,46.228 110.059,46.228 110.059,55.88
B on Bottom Layer "B_L04_P009" (solid, remove dead copper, pour order 9): 120.142,55.88 120.142,46.228 126.238,46.228 126.238,55.88
GND on Bottom Layer "24v" (solid, pour order 19): 160.909,55.372 160.909,61.849 167.386,61.849 167.386,55.372
24V on Bottom Layer "24v" (solid, pour order 63): 124.46,40.386 124.46,36.957 133.223,36.957 133.223,40.386
24V on Bottom Layer "24v" (solid, pour order 20): 108.204,40.513 108.204,35.941 117.094,35.941 117.094,40.513
24V on Bottom Layer "24v" (solid, pour order 18): 161.29,43.561 161.29,36.195 167.513,36.195 167.513,43.688
GND on Layer 2 "GND_L03_P072" (solid, remove dead copper, pour order 72): 100.711,61.849 100.711,36.322 167.64,36.322 167.64,61.849
C on Layer 2 "C_L03_P065" (solid, remove dead copper, pour order 65): 100.965,57.15 100.965,45.847 109.601,45.847 109.601,57.15
B on Layer 2 "B_L03_P066" (solid, remove dead copper, pour order 66): 116.608,57.166 116.608,47.26 116.481,47.133 124.99,47.133 124.99,57.166
A on Layer 2 "A_L03_P067" (solid, remove dead copper, pour order 67): 133.245,57.42 133.245,47.133 141.373,47.133 141.5,47.26 141.5,57.293
C on Layer 1 "C_L02_P070" (solid, remove dead copper, pour order 70): 100.965,56.896 100.965,46.99 110.236,46.99 110.363,47.117 110.363,56.769
GND on Layer 1 "GND_L02_P071" (solid, remove dead copper, pour order 71): 100.711,62.103 100.711,36.068 167.767,36.068 167.767,62.103
B on Layer 1 "B_L02_P068" (solid, remove dead copper, pour order 68): 116.715,61.595 125.095,61.595 124.841,61.341 124.841,51.689 116.713,51.689 116.649,51.625
A on Layer 1 "A_L02_P069" (solid, remove dead copper, pour order 69): 133.032,62.127 133.159,62 141.287,62 141.287,51.967 141.16,51.84 133.243,51.84

## Silkscreen, mask and mechanical layers (free items; w line width, h text height)
Top Overlay:
  drawing of 6 lines, arcs and shapes, not listed
  text "-" at 164.949,52.316 h2 r90
  text "2122500031_Ahmad Hanif Abiyyu Khrisna" at 114.119,51.079 h1
  text "Politeknik Elektronika Negeri Surabaya" at 114.166,49.301 h1
  text "+" at 165.235,44.95 h2 r90
  text "3.3V" at 150.645,37.361 h0.5
  text "GND" at 153.439,37.361 h0.5
  text "SWDIO" at 155.725,37.361 h0.5
  text "SWCLK" at 158.265,37.361 h0.5
Mechanical 1:
  the board outline again, w0.254